# EAGLE board mrone (EAGLE 5.10)
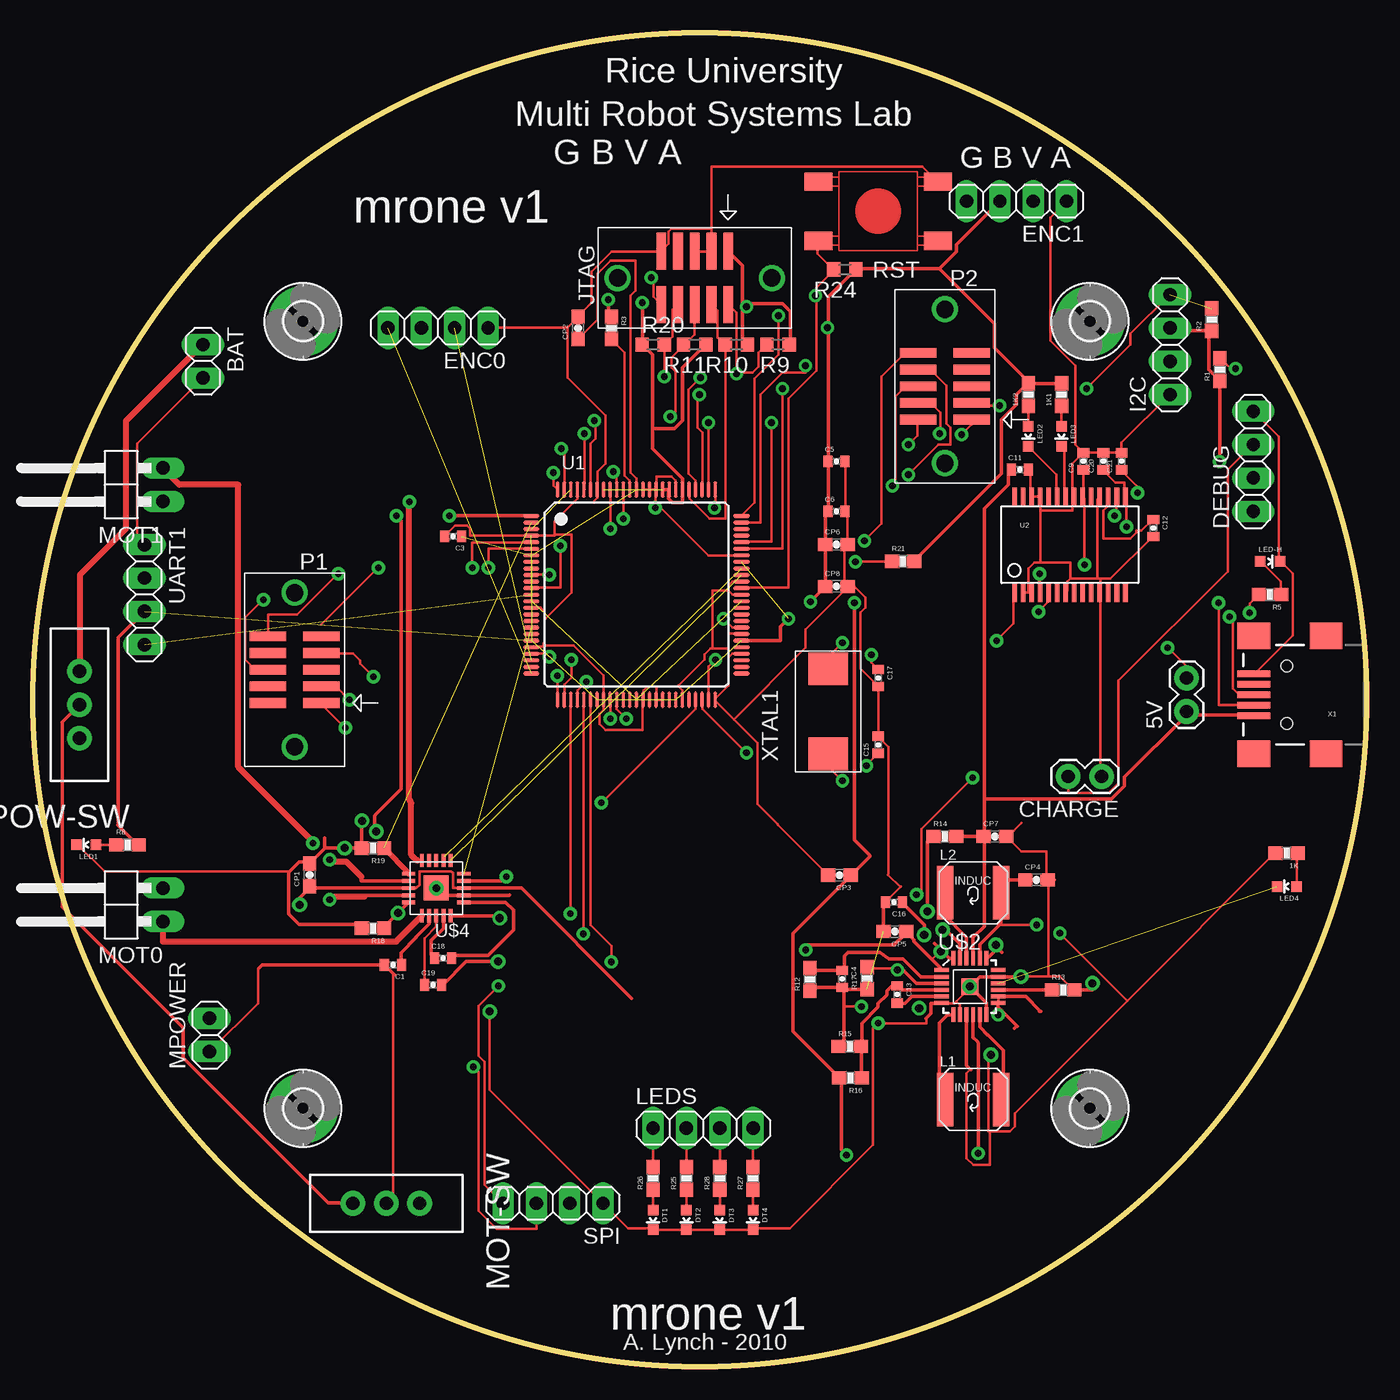
[diagram p0: board, top side]
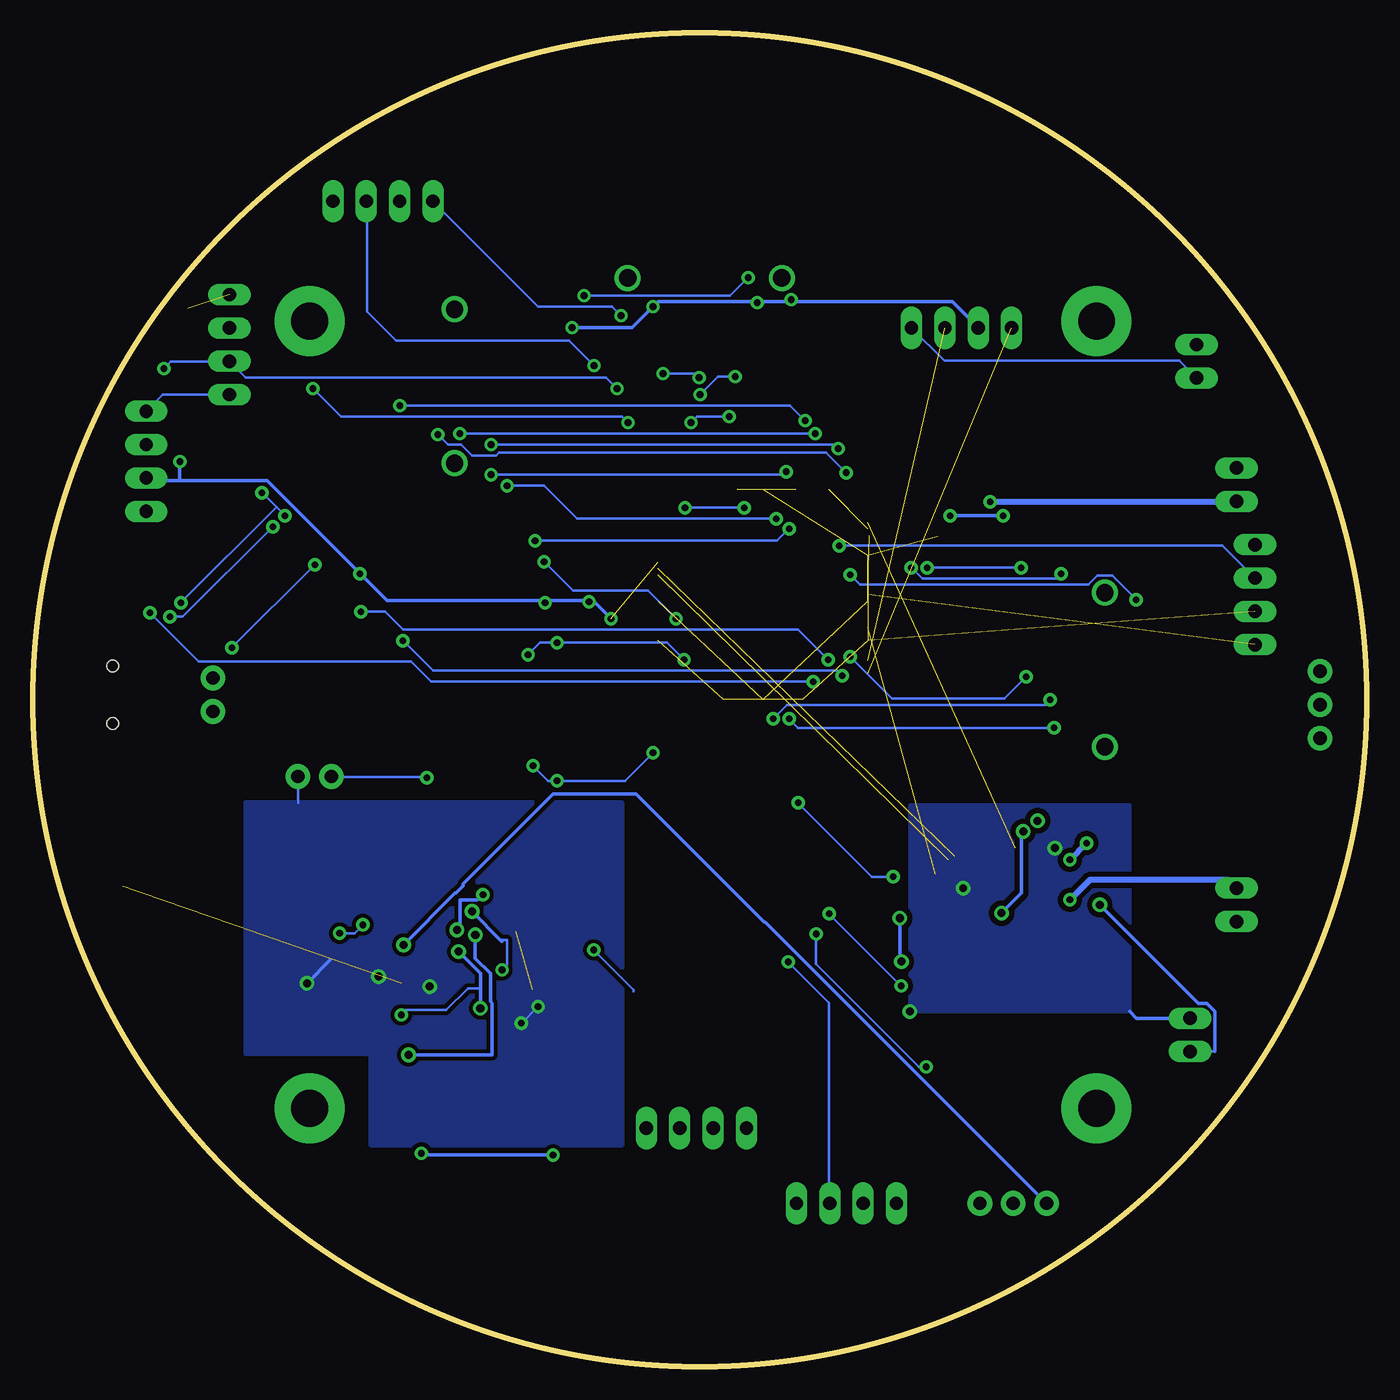
[diagram p1: board, bottom side, seen from below]

Size 101.6 x 101.6 mm. Coordinates in mm from the lower left corner, seen from the top.
Outline: circle at 50.8,50.8 radius 50.8
Copper layers (1*16): Top 0.035mm / dielectric 1.5mm / Bottom 0.035mm
Design rules "SparkFun *": minimum track width 8mil, minimum drill 20mil, track to track 7mil, track to pad 7mil, pad to pad 7mil, via to via 7mil, smd to smd 7mil, copper to edge 10mil, drill to drill 8mil, minimum pad ring 12mil, minimum via ring 10mil, stop-mask expansion 4mil, vias tented up to drill 25mil, thermal gap 10mil
Net classes: 0 default: width 0.203 mm, drill 0.203 mm, clearance 0.203 mm; 1 motors: width 0.457 mm, drill 0.203 mm, clearance 0.203 mm; 2 power: width 0.279 mm, drill 0.203 mm, clearance 0.203 mm

## Footprints (pad centres in the part's own frame; a part is rotated, then mirrored left to right if it is on the bottom)
0603-RES = smd 1.1 x 1: 1 -0.85,0; 2 0.85,0
1X02 = drill 1.016 pad 1.88 round: 1 0,0; 2 2.54,0
1X02' = drill 1.016 long: 1 -1.27,0; 2 1.27,0
0402-CAP = smd 0.7 x 0.9: 1 -0.65,0; 2 0.65,0
0603-CAP = smd 1.1 x 1: 1 -0.85,0; 2 0.85,0
1X04 = drill 1.016 long: 1 -3.81,0; 2 -1.27,0; 3 1.27,0; 4 3.81,0
LED-0603 = smd 0.8 x 0.8: A 0,-0.75; C 0,0.75
2,8-PAD = drill 2.8 pad 5.334 round: B2,8 0,0
105-01-L-D-SM-LC = smd 0.737 x 2.794: 1 -2.54,-2.032; 2 -2.54,2.032; 3 -1.27,-2.032; 4 -1.27,2.032; 5 0,-2.032; 6 0,2.032; 7 1.27,-2.032; 8 1.27,2.032; 9 2.54,-2.032; 10 2.54,2.032 | drill 1.321 round: P$11 5.867,0; P$12 -5.867,0
LPS4018-REC = smd 1.27 x 4.064: 1 -2.134,0.025; 2 2.134,0.025
1X02/90 = drill 1.016 long: 1 -1.27,-3.81; 2 1.27,-3.81
SWITCH-SPDT = drill 1.016 pad 1.88 round: 1 0,2.54; 2 0,0; 3 0,-2.54
R0603 = smd 1 x 1.1: 1 -0.85,0; 2 0.85,0
EIA-481 = smd 1.4 x 2.1: 1 -2.25,4.55; 2 -2.25,-4.55; 3 2.25,4.55; 4 2.25,-4.55
LQFP100 = smd 0.3 x 1.25: 1 -6,-8; 2 -5.5,-8; 3 -5,-8; 4 -4.5,-8; 5 -4,-8; 6 -3.5,-8; 7 -3,-8; 8 -2.5,-8; 9 -2,-8; 10 -1.5,-8; 11 -1,-8; 12 -0.5,-8; 13 0,-8; 14 0.5,-8; 15 1,-8; 16 1.5,-8; 17 2,-8; 18 2.5,-8; 19 3,-8; 20 3.5,-8; 21 4,-8; 22 4.5,-8; 23 5,-8; 24 5.5,-8; 25 6,-8; 51 6,8; 52 5.5,8; 53 5,8; 54 4.5,8; 55 4,8; 56 3.5,8; 57 3,8; 58 2.5,8; 59 2,8; 60 1.5,8; 61 1,8; 62 0.5,8; 63 0,8; 64 -0.5,8; 65 -1,8; 66 -1.5,8; 67 -2,8; 68 -2.5,8; 69 -3,8; 70 -3.5,8; 71 -4,8; 72 -4.5,8; 73 -5,8; 74 -5.5,8; 75 -6,8 | smd 1.25 x 0.3: 26 8,-6; 27 8,-5.5; 28 8,-5; 29 8,-4.5; 30 8,-4; 31 8,-3.5; 32 8,-3; 33 8,-2.5; 34 8,-2; 35 8,-1.5; 36 8,-1; 37 8,-0.5; 38 8,0; 39 8,0.5; 40 8,1; 41 8,1.5; 42 8,2; 43 8,2.5; 44 8,3; 45 8,3.5; 46 8,4; 47 8,4.5; 48 8,5; 49 8,5.5; 50 8,6; 76 -8,6; 77 -8,5.5; 78 -8,5; 79 -8,4.5; 80 -8,4; 81 -8,3.5; 82 -8,3; 83 -8,2.5; 84 -8,2; 85 -8,1.5; 86 -8,1; 87 -8,0.5; 88 -8,0; 89 -8,-0.5; 90 -8,-1; 91 -8,-1.5; 92 -8,-2; 93 -8,-2.5; 94 -8,-3; 95 -8,-3.5; 96 -8,-4; 97 -8,-4.5; 98 -8,-5; 99 -8,-5.5; 100 -8,-6
SSOP28DB = smd 0.348 x 1.397: 1 -4.225,-3.656; 2 -3.575,-3.656; 3 -2.925,-3.656; 4 -2.275,-3.656; 5 -1.625,-3.656; 6 -0.975,-3.656; 7 -0.325,-3.656; 8 0.325,-3.656; 9 0.975,-3.656; 10 1.625,-3.656; 11 2.275,-3.656; 12 2.925,-3.656; 13 3.575,-3.656; 14 4.225,-3.656; 15 4.225,3.656; 16 3.575,3.656; 17 2.925,3.656; 18 2.275,3.656; 19 1.625,3.656; 20 0.975,3.656; 21 0.325,3.656; 22 -0.325,3.656; 23 -0.975,3.656; 24 -1.625,3.656; 25 -2.275,3.656; 26 -2.925,3.656; 27 -3.575,3.656; 28 -4.225,3.656
QFN-24 = smd 1.1 x 0.3: 1 -2.15,1.25; 2 -2.15,0.75; 3 -2.15,0.25; 4 -2.15,-0.25; 5 -2.15,-0.75; 6 -2.15,-1.25; 13 2.15,-1.25; 14 2.15,-0.75; 15 2.15,-0.25; 16 2.15,0.25; 17 2.15,0.75; 18 2.15,1.25 | smd 0.3 x 1.1: 7 -1.25,-2.15; 8 -0.75,-2.15; 9 -0.25,-2.15; 10 0.25,-2.15; 11 0.75,-2.15; 12 1.25,-2.15; 19 1.25,2.15; 20 0.75,2.15; 21 0.25,2.15; 22 -0.25,2.15; 23 -0.75,2.15; 24 -1.25,2.15 | smd 1.27 x 1.27: 25 0,0
QFN-20 = smd 1 x 0.3: 1 -2.1,1.1; 2 -2.1,0.55; 3 -2.1,0; 4 -2.1,-0.55; 5 -2.1,-1.1; 11 2.1,-1.1; 12 2.1,-0.55; 13 2.1,0; 14 2.1,0.55; 15 2.1,1.1 | smd 0.3 x 1: 6 -1.1,-2.1; 7 -0.55,-2.1; 8 0,-2.1; 9 0.55,-2.1; 10 1.1,-2.1; 16 1.1,2.1; 17 0.55,2.1; 18 0,2.1; 19 -0.55,2.1; 20 -1.1,2.1 | smd 1.9 x 1.9: THERMALPAD 0,0
USB-MINIB = smd 2.5 x 0.5: D+ 2.5,0; D- 2.5,0.8; GND 2.5,-1.6; ID 2.5,-0.8; VBUS 2.5,1.6 | smd 2.5 x 2: GND@1 -3,-4.5; GND@2 -3,4.5; GND@3 2.5,4.5; GND@4 2.5,-4.5 | hole 0.9: 0,2.2; 0,-2.2
STANDARDSMDCRYSTAL8MHZ = smd 2.5 x 3: 1 -3.25,0; 2 3.25,0

## Placement (x,y rotation side)
1K  330  [0603-RES]  95.5,39.12 180 top
1K1  330  [0603-RES]  78.36,74.04 90 top
1K2  330  [0603-RES]  75.82,74.04 90 top
5V  [1X02]  87.88,49.91 90 top
BAT  [1X02']  12.95,76.58 270 top
C1  0.1uF  [0402-CAP]  27.43,30.61 180 top
C3  0.1uF  [0402-CAP]  32,63.25 180 top
C4  0.1uF  [0402-CAP]  61.65,29.54 270 top
C5  0.1uF  [0402-CAP]  61.21,68.96 0 top
C6  0.1uF  [0402-CAP]  61.21,65.15 0 top
C9  0.1uF  [0402-CAP]  80.01,68.96 90 top
C11  0.1uF  [0402-CAP]  75.18,68.33 0 top
C12  0.1uF  [0402-CAP]  85.34,63.88 270 top
C13  1.5nF  [0402-CAP]  65.84,28.35 270 top
C15  20pf  [0402-CAP]  64.39,47.37 90 top
C16  1uF  [0402-CAP]  65.58,35.38 180 top
C17  20pf  [0402-CAP]  64.39,52.45 270 top
C18  0.1uF  [0402-CAP]  31.24,31.11 0 top
C19  0.1uF  [0402-CAP]  30.48,29.08 0 top
C20  18pf  [0402-CAP]  81.53,68.96 90 top
C21  18pf  [0402-CAP]  82.93,68.96 90 top
CHARGE  [1X02]  81.41,44.96 180 top
CP1  10uF  [0603-CAP]  21.08,37.46 90 top
CP2  10uF  [0603-CAP]  41.53,79.12 90 top
CP3  10uF  [0603-CAP]  61.44,37.44 180 top
CP4  10uF  [0603-CAP]  76.45,37.08 0 top
CP5  1uF  [0603-CAP]  65.66,33.15 180 top
CP6  1uF  [0603-CAP]  61.21,62.61 0 top
CP7  4.7uF  [0603-CAP]  73.28,40.39 0 top
CP8  1uF  [0603-CAP]  61.21,59.44 0 top
DEBUG  [1X04]  92.96,68.96 90 top
DT1  Power  [LED-0603]  47.24,11.18 180 top
DT2  Power  [LED-0603]  49.78,11.18 180 top
DT3  Power  [LED-0603]  52.32,11.18 180 top
DT4  Power  [LED-0603]  54.86,11.18 180 top
ENC0  [1X04]  30.86,79.12 180 top
ENC1  [1X04]  74.93,88.77 180 top
H1  MOUNT-PAD-ROUND2.8  [2,8-PAD]  80.52,19.68 0 top
H2  MOUNT-PAD-ROUND2.8  [2,8-PAD]  20.57,19.68 0 top
H3  MOUNT-PAD-ROUND2.8  [2,8-PAD]  80.52,79.63 0 top
H4  MOUNT-PAD-ROUND2.8  [2,8-PAD]  20.57,79.63 0 top
I2C  [1X04]  86.61,77.85 90 top
JTAG  SAMTECJ-TAG  [105-01-L-D-SM-LC]  50.42,82.93 180 top
L1  2.2uH  [LPS4018-REC]  71.63,20.32 0 top
L2  3.3uH  [LPS4018-REC]  71.63,36.07 0 top
LED1  Power  [LED-0603]  4.06,39.75 90 top
LED2  TXLED  [LED-0603]  75.82,70.87 180 top
LED3  RXLED  [LED-0603]  78.36,70.87 180 top
LED4  Charge  [LED-0603]  95.5,36.58 90 top
LED-H  Blinky  [LED-0603]  94.23,61.34 270 top
LEDS  [1X04]  51.05,18.16 0 top
MOT0  [1X02/90]  6.1,35.18 90 top
MOT1  [1X02/90]  6.1,67.18 90 top
MOT-SW  [SWITCH-SPDT]  26.92,12.45 270 top
MPOWER  [1X02']  13.46,25.27 90 top
P1  50MILHEADERS  [105-01-L-D-SM-LC]  19.94,53.09 90 top
P2  50MILHEADERS  [105-01-L-D-SM-LC]  69.47,74.68 90 top
POW-SW  [SWITCH-SPDT]  3.56,50.42 180 top
R1  3K  [0603-RES]  90.42,75.95 90 top
R2  3K  [0603-RES]  89.79,79.76 90 top
R3  10K  [0603-RES]  44.07,79.12 270 top
R5  330  [0603-RES]  94.23,58.8 180 top
R8  330  [0603-RES]  7.21,39.75 0 top
R9  27  [R0603]  56.77,77.85 180 top
R10  27  [R0603]  53.59,77.85 180 top
R11  27  [R0603]  50.42,77.85 180 top
R12  3.01K  [0603-RES]  59.21,29.49 90 top
R13  2K  [0603-RES]  78.49,28.7 0 top
R14  100K  [0603-RES]  69.47,40.39 0 top
R15  105K  [0603-RES]  62.23,24.38 0 top
R16  324K  [0603-RES]  62.28,22 180 top
R17  100K  [0603-RES]  63.55,29.59 90 top
R18  0.1  [0603-RES]  25.91,33.4 180 top
R19  0.1  [0603-RES]  25.91,39.5 180 top
R20  27  [R0603]  47.24,77.85 0 top
R21  10K  [0603-RES]  66.29,61.34 0 top
R24  10K  [R0603]  61.85,83.57 180 top
R25  330  [0603-RES]  49.78,14.35 90 top
R26  330  [0603-RES]  47.24,14.35 90 top
R27  330  [0603-RES]  54.86,14.35 90 top
R28  330  [0603-RES]  52.32,14.35 90 top
RST  PUSHBUTTONSWITCH  [EIA-481]  64.39,88.01 90 top
SPI  [1X04]  39.62,12.45 180 top
U1  LM3S8962  [LQFP100]  45.97,58.8 270 top
U2  FT232RL-BASICSSOP  [SSOP28DB]  78.99,62.61 0 top
U$2  POWER-LTC3566  [QFN-24]  71.37,28.96 0 top
U$4  MOTOR-A3906  [QFN-20]  30.73,36.45 180 top
UART1  [1X04]  8.51,58.8 270 top
X1  USBSMD  [USB-MINIB]  95.5,51.18 180 top
XTAL1  8MHZ  [STANDARDSMDCRYSTAL8MHZ]  60.58,49.91 90 top

## Library data of the parts
1K 1K1 1K2 5V C1 C3-C6 C9 C11-C13 C15-C21 CHARGE DT1-DT4 LED1-LED4 LED-H MOT-SW POW-SW R1-R3 R5 R8 R12-R19 R21 R25-R28 U2 X1 = SparkFun
BAT DEBUG ENC0 ENC1 I2C LEDS MOT0 MOT1 MPOWER SPI UART1 = pinhead
CP1-CP8 JTAG L1 L2 P1 P2 RST U$2 U$4 XTAL1 = mrone
H1-H4 = holes
R9-R11 R20 R24 = resistor
U1 = luminary-arm

## Nets
+3.3V [power]: 1K1.2 1K2.2 C5.1 C6.1 CP3.1 CP6.1 CP8.1 DEBUG.2 ENC0.3 ENC1.3 I2C.3 JTAG.1 R1.1 R2.1 R3.1 R8.2 R9.1 R10.1 R11.1 R16.2 R20.1 R21.2 R24.1 U1.8 U1.20 U1.32 U1.36 U1.44 U1.56 U1.68 U1.81 U1.83 U1.84 U1.93 U2.4 U$2.10 UART1.3
+3.3VLDO: CP5.1 U$2.1 U$2.13 U$2.14 U$2.24
+5V: 5V.2 C9.1 U2.20
+5VUSB [power]: 5V.1 C11.1 CP7.1 R14.2 U$2.21 X1.VBUS
ADC2: U1.5
ADC2_NR: P1.9
ADC3: U1.6
ADC3_NR: P1.10
CHRG: LED4.C U$2.16
FTDI-RX: U1.26 U2.1
FTDI-TX: U1.27 U2.5
GND: BAT.2 C3.2 C4.2 C5.2 C6.2 C9.2 C11.2 C12.2 C15.2 C16.2 C17.2 C20.2 C21.2 CHARGE.1 CP1.2 CP2.2 CP3.2 CP4.2 CP5.2 CP6.2 CP7.2 CP8.2 DEBUG.4 DT1.C DT2.C DT3.C DT4.C ENC0.1 ENC1.1 I2C.1 JTAG.3 JTAG.5 JTAG.9 LED1.C LED-H.C MPOWER.2 R12.1 R13.2 R15.1 R17.1 R18.2 R19.2 RST.4 SPI.1 U1.4 U1.9 U1.15 U1.21 U1.33 U1.39 U1.41 U1.42 U1.45 U1.50 U1.54 U1.57 U1.63 U1.65 U1.69 U1.76 U1.82 U1.85 U1.86 U1.87 U1.94 U1.97 U2.2 U2.3 U2.7 U2.11 U2.18 U2.21 U2.25 U2.26 U$2.6 U$2.8 U$2.12 U$2.17 U$2.25 U$4.2 U$4.THERMALPAD UART1.1 X1.GND
I2C_SCL: I2C.2 R1.2 U1.70
I2C_SDA: I2C.4 R2.2 U1.71
LED_HEART: R5.2 U1.29
MOT0_CUR [power]: R18.1 U1.1 U$4.15
MOT0_PWMA: U1.47 U$4.4
MOT0_PWMB: U1.18 U$4.5
MOT1_CUR [power]: R19.1 U1.2 U$4.11
MOT1_PWMA: U1.66 U$4.6
MOT1_PWMB: U1.67 U$4.7
N$1: C3.1 CP2.1 U1.7 U1.14 U1.38 U1.62 U1.88
N$2: 1K.1 LED4.A
N$3: LED-H.A R5.1
N$4: C18.1 U$4.19
N$5: R21.1 U1.58
N$6: LED1.A R8.1
N$7: R14.1 R17.2 U$2.3
N$8: C4.1 R12.2 U$2.2
N$9: C20.1 U2.15 X1.D+
N$10: LED2.C U2.23
N$11: L2.1 U$2.22
N$12 [motors]: MOT0.1 U$4.16
N$13: L1.1 U$2.7
N$14: L1.2 U$2.11
N$15: C13.2 U$2.5
N$16: C13.1 R15.2 R16.1 U$2.4
N$17: LED3.C U2.22
N$18 [motors]: MOT0.2 U$4.14
N$19 [motors]: MOT1.2 U$4.12
N$20 [motors]: MOT1.1 U$4.10
N$21 [motors]: BAT.1 POW-SW.3
N$23: C18.2 U$4.1
N$24: R13.1 U$2.15
N$26: C19.1 U$4.18
N$27: C21.1 U2.16 X1.D-
N$28: C19.2 U$4.20
N$29: C1.1 U$4.17
N$30: 1K2.1 LED2.A
N$34: 1K1.1 LED3.A
N$36: LEDS.1 R26.2
N$37: C12.1 U2.17
N$38: U1.3 U1.98
N$39: C15.1 U1.48 XTAL1.1
N$40: C17.1 U1.49 XTAL1.2
N$41: DT2.A R25.1
N$42: DT1.A R26.1
N$43: DT4.A R27.1
N$44: DT3.A R28.1
N$45: LEDS.2 R25.2
N$46: LEDS.3 R28.2
N$47: LEDS.4 R27.2
N$56: R3.2 U1.89
PA6: U1.34
PA6_NR: P1.1
PA7: U1.35
PA7_NR: P1.3
PB4: U1.92
PB4_NR: P2.10
PB5: U1.91
PB5_NR: P2.8
PB6: U1.90
PB6_NR: P2.6
PC5: U1.24
PC5_NR: P1.5
PC7: U1.22
PC7_NR: P1.7
PD0: U1.10
PD0_NR: P1.6
PD1: U1.11
PD1_NR: P1.4
PD4: U1.95
PD4_NR: P2.3
PD5: U1.96
PD5_NR: P2.4
PD6: U1.99
PD6_NR: P2.2
PD7: U1.100
PD7_NR: P2.1
PF1: U1.61
PF1NR: P2.9
PF2: U1.60
PF2_NR: P2.7
PF3: U1.59
PF3_NR: P2.5
PG0: U1.19
PG0_NR: P1.8
POWER_CHRGEN: CHARGE.2 DEBUG.3 U$2.23
PWM4: U1.72
PWM5: U1.73
QEI0_A: ENC0.4 U1.25
QEI0_B: ENC0.2 U1.23
QEI1_A: ENC1.4 U1.75
QEI1_B: ENC1.2 U1.74
RST: JTAG.10 R24.2 RST.1 U1.64
SPI_MISO: SPI.3 U1.30
SPI_MOSI: SPI.2 U1.31
SPI_SCK: SPI.4 U1.28
TCK: JTAG.4 R10.2 U1.80
TDI: JTAG.8 R20.2 U1.78
TDO: JTAG.6 R11.2 U1.77
TMS: JTAG.2 R9.2 U1.79
U1_RX: U1.12 UART1.2
U1_TX: U1.13 UART1.4
VBAT [power]: MOT-SW.3 POW-SW.2 U$2.19
VBAT+300: 1K.2 C16.1 CP4.1 L2.2 U$2.9 U$2.20
VBAT-MOT: C1.2 CP1.1 MOT-SW.2 MPOWER.1 U$4.3 U$4.13

## Tracks (layer width: path | path; a pad name or v marks a point on that pad's centre or on a via)
+3.3V  (via drill 0.51)  (8 unrouted)
  Top 0.254: 71.62,25.1 U$2.10
  Top 0.279: R16.2 61.54,21.97 | 71.62,25.1 71.96,24.76 72.01,24.64 v72.01,16.26 | R8.2 8,39.75 6.48,41.27 6.5,41.35 6.5,55.52 UART1.3 | R16.2 61.34,22.1 57.91,25.53 57.91,33.02 62.23,37.34 CP3.1 62.36,37.46 63.75,38.86 63.73,38.99 62.59,40.13 v62.59,58.19 | v61.98,16.13 61.59,16.51 61.59,21.84 R16.2 | R21.2 67.16,61.39 73.79,68.02 73.79,72.14 74.93,73.28 74.93,74.04 75.77,74.88 1K2.2 | 1K1.2 78.36,74.88 75.92,74.88 1K2.2 | I2C.3 86.66,79.07 86.66,78.92 R2.1 89.56,78.84 89.56,75.95 90.4,75.11 R1.1 90.4,74.95 v90.4,68.94 | 60.6,79.15 60.6,69.09 C5.1 60.6,68.94 60.6,65.28 C6.1 60.53,65.13 60.38,64.97 60.38,62.61 CP6.1 60.38,62.53 60.38,59.49 CP8.1 60.3,59.33 v59.23,58.27 | 60.6,79.15 60.6,81.51 62.66,83.57 R24.1 62.81,83.64 69.06,83.64 | v57.56,56.97 56.95,56.36 56.95,55.3 U1.56 | v76.68,60.4 76.68,59.03 U2.4 | 69.06,83.64 70.36,84.94 70.36,85.47 ENC1.3 | 1K2.2 75.84,75.03 73.25,77.62 73.25,79.45 69.06,83.64 | U1.84 48.03,66.8 48.41,66.8 U1.83 48.41,66.73 48.41,66.12 48.72,65.81 49.48,65.81 49.48,66.73 U1.81 49.48,67.64 47.19,69.93 47.19,71.45 | 47.19,71.45 47.19,77.09 46.43,77.85 R20.1 46.43,77.93 v46.43,81.05 | R11.1 51.23,77.85 49.48,76.1 49.48,72.06 48.87,71.45 47.19,71.45 | 54.05,80.97 54.05,83.87 JTAG.1 | 54.05,80.97 54.05,78.23 54.43,77.85 R10.1 | 54.36,80.97 57.1,80.97 57.71,80.37 57.71,77.93 R9.1 | 54.36,80.97 54.05,80.97 | v43.84,81.28 43.84,80.21 44.07,79.98 R3.1 | v54.36,80.75 54.36,80.97 | 60.6,79.15 v60.53,79.15
  Bottom 0.279: v72.01,16.26 71.88,16.13 v61.98,16.13 | v57.56,56.97 58.85,58.27 v59.23,58.27 59.31,58.34 62.59,58.34 | 62.59,58.34 74.62,58.34 v76.68,60.4 83.77,67.49 90.4,67.49 | 90.4,67.49 92.76,67.49 DEBUG.2 | 90.4,67.49 v90.4,68.94 | v62.59,58.19 62.59,58.34 | ENC0.3 29.59,79.15 31.57,81.13 43.69,81.13 v43.84,81.28 43.84,81.13 46.43,81.13 | 46.43,81.13 53.97,81.13 v54.36,80.75 55.96,79.15 v60.53,79.15 | 46.43,81.13 v46.43,81.05
+3.3VLDO  (via drill 0.51, 0.61)
  Top 0.203: v58.88,31.75 58.88,32.13 | U$2.13 73.53,27.81 U$2.14 | v73.53,26.8 73.82,27.09 | v69.16,31.62 69.09,31.62 68.49,31.03
  Top 0.254: U$2.1 69.22,30.29 68.49,31.03 67.13,32.38 67.13,32.52 CP5.1 66.5,33.02 65.61,32.13 58.88,32.13 | U$2.24 69.81,31.11 69.23,31.69 | 69.23,31.69 68.66,32.26 | v67.51,27.3 67.26,27.05 | v69.16,31.62 69.23,31.69 | U$2.13 73.52,27.39 73.82,27.09 74.94,25.97 | 74.94,25.97 75.01,25.91 | 74.94,25.97 74.75,25.78 | U$2.14 75.63,28.21 76.72,27.11 | 76.72,27.11 76.78,27.05 | 76.72,27.11 76.66,27.05
  Bottom 0.203: v58.88,31.75 55.83,28.7 55.83,28.57 | v73.53,26.8 73.15,27.18 70.1,27.18 68.45,28.83 67.51,28.83
  Bottom 0.254: v69.16,31.62 67.51,29.97 67.51,28.83 v67.51,27.3
+5V  (via drill 0.51)
  Top 0.203: C9.1 80.03,68.25 80.03,66.27 U2.20 80.03,66.19 80.11,66.12 v80.11,61.09 | v86.44,54.76 87.88,53.31 5V.2
  Bottom 0.203: v86.44,54.76 v80.11,61.09
+5VUSB
  Top 0.254: U$2.21 71.62,32.69
  Top 0.279: CP7.1 R14.2 70.31,40.51 | CP7.1 72.47,40.26 72.47,33.53 71.62,32.69 | X1.VBUS 92.99,49.66 87.88,49.66 5V.1 87.81,49.58 83.16,44.93 83.16,44.25 82.17,43.26 72.49,43.26 | 72.49,43.26 72.49,40.51 CP7.1 | 72.49,43.26 72.49,65.35 74.32,67.18 74.32,68.17 74.47,68.33 C11.1
ADC2  (via drill 0.51)
  Top 0.203: v33.48,60.86 33.48,62.76 37.97,62.76 U1.5 | 21.97,56.51 v26.31,60.86
  Bottom 0.203: v26.31,60.86 v33.48,60.86
ADC3  (via drill 0.51)
  Top 0.203: v34.7,60.86 34.7,62.31 U1.6 | v23.27,60.4 20.14,57.28 17.93,57.28 17.93,55.68
  Bottom 0.203: v34.7,60.86 33.86,60.02 23.65,60.02 v23.27,60.4
CHRG  (1 unrouted)
FTDI-RX  (via drill 0.51)
  Top 0.203: v39.95,52.63 39.95,50.88 U1.26 | v73.41,55.3 74.7,56.59 74.7,58.95 U2.1
  Bottom 0.203: v39.95,52.63 40.34,53.01 71.12,53.01 v73.41,55.3
FTDI-TX  (via drill 0.51)
  Top 0.203: v41.02,53.85 41.02,52.48 40.49,51.94 40.49,50.88 U1.27 | v76.61,57.51 77.37,58.27 U2.5
  Bottom 0.203: v41.02,53.85 43.31,56.13 73.41,56.13 74.78,57.51 v76.61,57.51
GND  (via drill 0.51, 0.6, 0.61)  (2 unrouted)
  Top 0.203: 66.08,36.54 64.97,35.43 C16.2 | 66.08,36.54 66.12,36.58 | 70.33,27.84 70.18,27.69 69.29,27.69 U$2.6 | 70.33,27.84 71.32,28.83 U$2.25 | CP4.2 77.22,37.08 77.22,39.24 75.31,39.24 74.17,40.39 CP7.2 74.29,40.39 75.31,41.4 | 74.61,29.71 74.68,29.72 v75.26,29.72 77.34,29.72 | 70.33,27.84 70.61,27.56 70.61,26.92 U$2.8 | 77.34,29.72 78.23,29.72 79.25,28.7 R13.2 | 77.34,29.72 77.34,37.08 | v63.12,27.43 61.79,27.43 | 68.05,26.57 68.07,26.54 68.07,26.16 v64.39,26.16 64.01,25.78 64.01,16.89 57.66,10.54 54.86,10.54 DT4.C 54.86,10.41 52.32,10.41 | 49.78,10.41 47.24,10.41 DT1.C 47.24,10.54 45.34,10.54 SPI.1 34.8,21.08 v34.8,27.05 | 49.78,10.41 52.32,10.41 | 49.78,10.41 DT2.C | 52.32,10.41 DT3.C | LED1.C 3.43,39.75 5.46,37.72 19.43,37.72 19.48,37.64 | 66.08,36.54 65.15,37.46 65.18,37.54 65.18,47.22 64.41,47.98 C15.2 64.41,48.06 64.41,51.79 C17.2 64.34,51.87 63.04,53.16 63.04,57.43 63.42,57.81 63.42,58.57 62.59,59.41 62.13,59.41 CP8.2 | CP3.2 60.58,37.46 56.77,41.27 56.72,41.35 55.19,42.87 55.19,47.52 53.4,49.31 | UART1.1 8.48,62.61 7.95,63.14 7.95,70.31 BAT.2 | 40.72,79.15 41.48,79.91 CP2.2 41.55,80.06 42.54,81.05 42.54,83.41 44.07,84.94 47.8,84.94 JTAG.9 47.88,85.01 48.41,85.55 48.41,86.46 48.64,86.69 51.69,86.69 | 40.72,79.15 34.7,79.15 ENC0.1 | 51.69,86.69 51.69,91.41 67.77,91.41 68.91,90.27 RST.4 | 51.69,86.69 JTAG.3 51.61,84.94 50.47,84.94 JTAG.5 | C5.2 61.9,68.94 61.9,65.2 C6.2 61.9,65.13 62.05,64.97 62.05,62.61 CP6.2 62.05,62.53 61.82,62.31 61.82,59.71 62.05,59.49 CP8.2 | 39.73,63.37 39.73,64.36 41.21,65.85 | 39.73,63.37 39.73,63.3 38.05,63.3 U1.4 37.9,63.3 33.32,63.3 33.32,63.83 33.1,64.06 32.18,64.06 31.5,63.37 31.5,63.3 C3.2
  Top 0.203: 41.21,65.85 41.48,66.12 41.48,66.73 U1.97 | 41.21,65.85 41.25,65.81 42.62,65.81 43,66.19 43,66.73 U1.94 43,66.88 43,68.17 43.61,68.78 43.61,72.44 40.72,75.34 40.72,79.15 | 38.89,54.91 38.89,55.07 38.96,55.14 38.96,56.97 | 38.89,54.91 38.89,54.84 38.05,54.84 U1.21 | 38.96,56.97 38.96,57.51 38.66,57.81 38.05,57.81 U1.15 | 38.89,54.91 41.17,54.91 43.46,52.63 43.46,50.88 U1.33 43.46,50.72 43.46,50.04 43.16,49.73 43.16,48.97 43.61,48.51 46.43,48.51 46.43,50.72 U1.39 46.51,50.88 46.51,51.49 46.81,51.79 47.5,51.79 | U1.87 46.51,66.8 U1.86 47.04,66.8 47.42,66.8 U1.85 | U1.82 48.95,66.8 48.95,67.49 48.64,67.79 47.5,67.79 47.5,66.88 U1.85 | v51.92,65.43 51.99,65.51 51.99,66.73 U1.76 | U1.85 47.42,66.73 v47.42,65.43 47.8,65.43 51.46,61.77 52.98,61.77 | 52.98,59.11 53.29,58.8 U1.63 | 52.98,59.11 52.98,59.49 | 52.98,59.49 53.29,59.79 53.9,59.79 U1.65 | 52.98,61.77 53.9,61.77 U1.69 | 52.98,59.49 52.98,61.77 | 47.5,51.79 47.5,50.88 U1.41 47.57,50.8 47.95,50.8 U1.42 | 49.17,51.79 49.48,51.49 49.48,50.88 U1.45 | 47.5,51.79 49.17,51.79 | 52.98,54 52.98,51.87 51.99,50.88 U1.50 51.99,50.72 53.4,49.31 | 52.98,54 53.29,54.3 53.9,54.3 U1.54 | 52.98,54.69 52.98,55.83 53.9,55.83 U1.57 | 52.98,54.69 52.98,54 | 51.77,54.69 51.61,54.69 51.16,54.23 51.16,53.85 49.17,51.87 49.17,51.79 | 51.77,54.69 52.98,54.69 | 52.98,59.11 51.77,59.11 51.77,54.69 | 39.73,63.37 41.02,63.37 41.02,58.95 39.04,56.97 38.96,56.97 | CP8.2 62.05,59.33 58.85,56.13 58.85,54.76 53.4,49.31 | C11.2 76,68.17 76,66.27 U2.26 76.15,66.27 76.68,66.27 U2.25 76.76,66.19 76.76,65.2 | 75.84,58.95 76,58.95 U2.3 | 75.84,58.95 75.46,58.95 U2.2
  Top 0.203: 81.33,60.02 82.09,60.02 85.29,63.22 C12.2 | 81.33,60.02 81.33,59.03 U2.11 81.33,58.88 81.33,45.08 81.41,45.01 CHARGE.1 | 79.04,60.02 78.82,59.79 78.82,59.11 78.74,59.03 U2.7 | 81.1,60.02 79.04,60.02 | 81.33,60.02 81.1,60.02 | U2.18 81.25,66.19 81.1,66.04 81.1,60.02 | 76.76,61.24 79.04,61.24 79.04,60.02 | 76.76,61.24 76.3,61.24 75.84,60.78 75.84,58.95 | 76.76,61.24 76.76,65.2 | X1.GND 93.07,52.78 95.96,55.68 95.96,60.4 95.05,61.32 LED-H.C 94.97,61.39 94.89,61.47 94.89,70.84 DEBUG.4 | C9.2 80.03,69.62 81.48,69.62 C20.2 81.64,69.62 C21.2 82.93,70.38 86.59,74.04 I2C.1 | C9.2 79.96,69.54 79.2,68.78 79.2,66.34 79.27,66.27 U2.21 79.2,66.27 79.2,65.2 76.76,65.2 | ENC1.1 78.74,88.75 77.52,87.53 77.52,78.16 79.43,76.25 79.43,70.23 79.96,69.7 C9.2
  Top 0.254: U$4.THERMALPAD 31.28,35.9 U$4.2 36.28,35.9 36.3,35.92 | v23.75,39.5 22.26,39.5 CP1.2 | v23.75,39.5 22.25,39.5 22.24,39.48 | v23.75,39.5 R19.2 25.06,41.52 25.07,41.53 | 22.24,39.48 21.18,38.43 20.27,38.43 19.48,37.64 19.48,34.49 20.27,33.71 24.75,33.71 R18.2 | 61.79,28.74 R17.1 | 61.79,28.74 C4.2 59.46,28.89 R12.1 | 61.79,28.74 61.79,27.43 61.79,24.8 R15.1 | U$2.12 72.62,27.71 U$2.25 72.12,29.71 U$2.17 74.61,29.71 | CP5.2 64.81,35.26 C16.2 | v80.72,29.21 80.72,28.7 R13.2 | CP4.2 77.34,37.08 77.8,37.08 | 68.02,26.54 68.05,26.57 68.4,26.92 68.4,27.69 69.16,27.69 U$2.6 | 22.22,40.26 22.22,39.5 22.24,39.48
  Bottom 0.203: v64.39,26.16 v63.12,27.43 | BAT.2 14.27,76.63 32.18,76.63 ENC0.1 | v47.42,65.43 v51.92,65.43 | 81.41,42.93 CHARGE.1 | DEBUG.4 91.69,74.04 I2C.1
  Bottom 0.254: v80.72,29.21 78.94,30.99 | MPOWER.2 17.53,26.54 18.03,27.05
  other vias: 30.73,36.45 71.37,28.96
  pour Bottom (isolate 0.406): 18.03,42.8 34.8,42.8 34.8,27.05 18.03,27.05
  pour Bottom (isolate 0.305): 56.77,16.89 75.82,16.89 75.82,23.88 85.34,23.88 85.34,42.93 56.77,42.93
I2C_SCL  (via drill 0.51)
  Top 0.203: v91.62,76.02 91.24,76.02 90.47,76.78 R1.2 | v57.1,74.5 57.1,62.31 U1.70
  Bottom 0.203: v91.62,76.02 91.08,76.56 86.66,76.56 I2C.2 85.37,75.34 57.94,75.34 v57.1,74.5
I2C_SDA  (via drill 0.51)  (1 unrouted)
  Top 0.203: v56.26,71.91 56.26,62.84 53.97,62.84 U1.71 | v80.26,74.5 83.62,77.85 83.62,78.69 86.59,81.66 I2C.4
  Bottom 0.203: v56.26,71.91 56.72,72.36 78.13,72.36 v80.26,74.5
LED_HEART  (via drill 0.51)
  Top 0.203: v92.69,57.43 92.69,58.11 93.37,58.8 R5.2 | v42.16,52.17 41.48,51.49 41.48,50.88 U1.29
  Bottom 0.203: v92.69,57.43 88.95,53.7 72.8,53.7 71.27,52.17 v42.16,52.17
MOT0_CUR  (via drill 0.51, 0.61)
  Top 0.279: U$4.15 28.57,35.31 v27.81,34.54 26.8,33.53 26.8,33.4 R18.1 | 26.03,40.89 v26.16,40.77 26.03,41.02 26.03,41.91 26.09,42.04 28.07,44.02 28.07,64.44 v27.69,64.82 | v31.72,64.82 37.97,64.82 U1.1
  Bottom 0.279: v27.81,34.54 26.29,36.07 26.29,40.64 v26.16,40.77 | v27.69,64.82 v31.72,64.82
MOT0_PWMA  (via drill 0.51)
  Top 0.203: v43.31,42.95 50.47,50.11 U1.47 | v36.07,37.31 35.92,37.16 35.81,37.08
  Top 0.254: U$4.4 35.68,37 35.71,37.03 35.81,37.08
  Bottom 0.203: v43.31,42.95 37.67,37.31 v36.07,37.31
MOT0_PWMB  (1 unrouted)
MOT1_CUR  (1 unrouted)
  Top 0.406: U$4.11 28.63,37.62 R19.1
MOT1_PWMA  (1 unrouted)
  Top 0.254: U$4.6 31.88,38.61
MOT1_PWMB  (1 unrouted)
  Top 0.203: 31.37,38.86 31.24,38.73 U$4.7
  Top 0.254: U$4.7 31.24,38.61
N$1  (5 unrouted)
  Top 0.203: CP2.1 41.55,78.31 43,79.76 43,83.26 43.99,84.25 45.9,84.25 45.9,81.97 45.52,81.58 45.52,68.1 45.97,67.64 U1.88
N$2
  Top 0.203: LED4.A 96.27,36.58 96.27,39.12 1K.1
N$3
  Top 0.203: LED-H.A 93.52,61.32 95.05,59.79 95.05,58.8 R5.1
N$4
  Top 0.254: U$4.19 31.28,33.39 30.35,32.46 30.35,31.35 C18.1
N$5  (via drill 0.51)
  Top 0.203: v62.66,61.32 65.41,61.32 R21.1 | v52.6,56.97 53.29,56.29 53.9,56.29 U1.58
  Bottom 0.203: v62.66,61.32 60.45,59.11 54.74,59.11 v52.6,56.97
N$6
  Top 0.203: LED1.A R8.1
N$7  (via drill 0.51, 0.61)
  Top 0.203: 65.86,30.35 63.7,30.35 R17.2
  Top 0.254: U$2.3 67.31,29.21 66.14,30.38 65.86,30.38 65.86,30.35 v65.86,30.23 | R17.2 63.61,30.38 | v68.15,34.67 68.15,40 68.53,40.39 R14.1
  Bottom 0.203: v65.86,30.23 65.48,30.61 65.48,32.51 65.86,32.51 65.93,32.45
  Bottom 0.254: 65.86,32.38 65.93,32.45 v68.15,34.67
N$8
  Top 0.254: U$2.2 67.65,29.71 66.29,31.06 65.23,31.06 64.52,31.57 62.1,31.57 61.82,31.29 61.82,30.37 C4.1 59.36,30.19 R12.2
N$9  (via drill 0.51)
  Top 0.203: C20.1 81.56,68.25 82.47,67.33 83.16,67.33 83.16,66.27 U2.15 83.24,66.19 83.31,66.12 v83.31,63.98 | v91.16,57.12 91.39,56.9 91.39,51.64 91.85,51.18 X1.D+
  Bottom 0.203: v83.31,63.98 90.17,57.12 v91.16,57.12
N$10
  Top 0.203: LED2.C 75.84,70.08 77.98,67.94 77.98,66.27 U2.23
N$11
  Top 0.254: U$2.22 71.12,32.71 69.42,34.42 69.42,36.02 L2.1
N$12
  Top 0.457: MOT0.1 9.91,32.38 27.69,32.38 29.59,34.29 U$4.16
N$13
  Top 0.254: U$2.7 69.68,26.81 69.06,26.19 69.06,20.78 L1.1
N$14
  Top 0.254: U$2.11 72.12,25.87 72.72,25.27 72.75,25.27 73.94,24.08 73.94,20.52 L1.2
N$15
  Top 0.254: U$2.5 66.97,28.21 66.45,27.69 65.85,27.69 C13.2
N$16
  Top 0.254: U$2.4 66.13,28.71 C13.1 65.42,29 65.05,28.63 65.05,28.32 64.39,27.66 64.39,27.41 63.14,26.16 63.14,24.45 R15.2 63.13,24.33 R16.1
N$17
  Top 0.203: LED3.C 78.36,70.08 78.59,69.85 78.59,66.34 U2.22
N$18  (via drill 0.51)
  Top 0.254: U$4.14 25.27,35.9 25.27,35.81
  Top 0.457: 25.27,35.81 22.61,35.81 v22.61,35.56
  Bottom 0.457: v22.61,35.56 21.08,37.08 10.54,37.08 MOT0.2
N$19  (via drill 0.51)
  Top 0.254: U$4.12 25.02,37 25.02,37.34
  Top 0.457: 25.02,37.34 23.88,38.48 22.61,38.48 v22.61,38.61 | 21.21,40 v21.34,39.88 21.13,40.21 15.65,45.69 15.65,67.18 11.15,67.18 9.93,68.4 MOT1.2
  Bottom 0.457: v22.61,38.61 v21.34,39.88
N$20  (via drill 0.51)
  Top 0.254: U$4.10 29.29,38.55
  Top 0.457: 29.29,38.55 29.21,38.61 28.83,38.99 28.83,42.93 28.75,43.1 28.68,43.18 v28.68,65.89
  Bottom 0.457: v28.68,65.89 9.93,65.89 MOT1.1
N$21
  Top 0.457: BAT.1 12.9,77.85 7.11,72.06 7.11,63.83 3.61,60.32 3.61,53.01 POW-SW.3
N$22  (via drill 0.6)
  other vias: 25.07,41.58
N$23
  Top 0.254: U$4.1 36.02,35.35 36.6,34.77 36.6,33.27 34.67,31.34 32.12,31.34 C18.2
N$24
  Top 0.254: U$2.15 R13.1
N$26
  Top 0.203: C19.1 29.84,29.08 29.84,32.64 30.73,33.53 U$4.18
N$27  (via drill 0.51)
  Top 0.203: v84.15,66.57 84.15,67.03 82.93,68.25 C21.1 | v82.4,64.82 82.55,64.97 82.55,66.19 U2.16 | v90.32,58.19 90.32,50.42 92.99,50.42 X1.D-
  Bottom 0.203: 83.04,65.47 v82.4,64.82 | 83.04,65.47 v84.15,66.57 | v90.32,58.19 83.04,65.47
N$28  (via drill 0.61)
  Top 0.254: U$4.20 35.3,34.35 35.36,34.29 35.43,34.29 v35.56,34.16 | v35.43,30.86 33.02,30.86 31.24,29.08 C19.2
  Bottom 0.254: v35.43,30.86 35.56,30.99 v35.56,34.16
N$29
  Top 0.254: U$4.17 30.18,33.71 29.21,32.74 29.21,32.69 28.04,31.52 28.04,30.65 C1.1
N$30
  Top 0.203: LED2.A 75.84,71.68 75.84,73.13 1K2.1
N$34
  Top 0.203: LED3.A 1K1.1
N$36
  Top 0.203: R26.2 LEDS.1
N$37
  Top 0.203: C12.1 85.29,64.52 84.45,63.68 84.07,63.68 84.07,63.52 83.62,63.07 81.56,63.07 81.56,65.2 81.86,65.51 81.86,66.19 U2.17
N$38  (1 unrouted)
N$39  (via drill 0.51)
  Top 0.203: v63.5,45.77 63.5,45.85 64.34,46.68 C15.1 | v61.67,44.63 60.6,45.69 60.6,46.61 XTAL1.1 | v54.36,46.76 51,50.11 51,50.8 U1.48
  Bottom 0.203: v63.5,45.77 62.36,44.63 v61.67,44.63 56.49,44.63 v54.36,46.76
N$40  (via drill 0.51)
  Top 0.203: v63.88,54.23 63.88,53.62 64.34,53.16 C17.1 | v61.67,55.14 60.6,54.08 60.6,53.16 XTAL1.2 | v51.99,53.85 51.46,53.31 51.46,50.88 U1.49
  Bottom 0.203: v63.88,54.23 62.97,55.14 v61.67,55.14 53.29,55.14 v51.99,53.85
N$41
  Top 0.203: R25.1 DT2.A
N$42
  Top 0.203: R26.1 DT1.A
N$43
  Top 0.203: R27.1 DT4.A
N$44
  Top 0.203: R28.1 DT3.A
N$45
  Top 0.203: R25.2 LEDS.2
N$46
  Top 0.203: R28.2 LEDS.3
N$47
  Top 0.203: R27.2 LEDS.4
N$56
  Top 0.203: R3.2 44.07,78.23 45.06,77.24 45.06,67.87 45.44,67.49 45.44,66.8 U1.89
PA6  (via drill 0.51)
  Top 0.203: v43.99,49.35 43.99,50.8 U1.34 | v23.8,48.67 21.97,50.49
  Bottom 0.203: v43.99,49.35 43.31,48.67 v23.8,48.67
PA7  (via drill 0.51)
  Top 0.203: v45.21,49.35 44.45,50.11 44.45,50.8 U1.35 | v24.1,50.8 23.11,51.79 21.97,51.79
  Bottom 0.203: v45.21,49.35 44.14,50.42 24.49,50.42 v24.1,50.8
PB4  (via drill 0.51)
  Top 0.203: v43.99,63.83 43.99,66.73 U1.92 | v63.35,62.92 64.64,64.21 64.64,75.41 66.4,77.16 67.39,77.16
  Bottom 0.203: v43.99,63.83 44.91,62.92 v63.35,62.92
PB5  (via drill 0.51)
  Top 0.203: v44.22,68.17 44.45,67.94 44.45,66.8 U1.91 | v66.7,67.94 68.99,70.23 69.9,70.23 69.9,71.53 69.6,71.83 69.6,74.73 68.38,75.95
  Bottom 0.203: v44.22,68.17 44.45,67.94 v66.7,67.94
PB6  (via drill 0.51)
  Top 0.203: v44.98,64.59 44.98,66.73 U1.90 | v65.48,67.11 65.71,67.33 65.71,73.89 66.47,74.65 67.39,74.65
  Bottom 0.203: v44.98,64.59 60.15,64.59 62.66,67.11 v65.48,67.11
PC7  (via drill 0.51)
  Top 0.203: v39.34,54.08 39.34,54.3 38.05,54.3 U1.22 | v25.93,52.55 24.94,53.54 24.94,53.77 24.41,54.3 21.97,54.3
  Bottom 0.203: v39.34,54.08 36.14,50.88 27.61,50.88 v25.93,52.55
PD0  (via drill 0.51)
  Top 0.203: v39.34,60.32 38.05,60.32 U1.10 | v17.55,58.42 16.18,57.05 16.18,53.85 16.94,53.09
  Bottom 0.203: v39.34,60.32 38.58,59.56 21.21,59.56 20.52,60.25 19.38,60.25 v17.55,58.42
PD4  (via drill 0.51)
  Top 0.203: v42.77,72.06 42.85,71.98 42.85,70.69 42.47,70.31 U1.95 | v73.63,73.2 71.5,73.2
  Bottom 0.203: v42.77,72.06 43.92,73.2 v73.63,73.2
PD5  (via drill 0.51)
  Top 0.203: v42.01,71.07 42.01,66.8 U1.96 | v69.06,71.07 69.14,71.14 69.14,72.67 68.45,73.35 67.46,73.35
  Bottom 0.203: v42.01,71.07 v69.06,71.07
PD6  (via drill 0.51)
  Top 0.203: v40.26,69.93 40.49,69.7 40.49,66.8 U1.99 | v66.7,70.23 67.39,70.92 67.39,72.14
  Bottom 0.203: v40.26,69.93 40.56,70.23 v66.7,70.23
PD7  (via drill 0.51)
  Top 0.203: v39.65,68.1 39.65,67.11 39.95,66.8 U1.100 | v70.74,70.99 71.5,71.75
  Bottom 0.203: v39.65,68.1 41.17,69.62 66.09,69.62 66.32,69.39 68.15,69.39 68.99,70.23 69.98,70.23 v70.74,70.99
POWER_CHRGEN  (via drill 0.51, 0.61)
  Top 0.203: v67.31,35.94 67.69,36.32 67.69,40.97 v71.58,44.86 | DEBUG.3 92.91,70.23 91.01,68.33 91.01,60.55 82.7,52.25 82.7,44.47 81.94,43.71 78.89,43.71 78.89,44.93 CHARGE.2
  Top 0.254: U$2.23 70.62,32.19 69.67,33.15 69.29,33.15 v69.29,33.27
  Bottom 0.203: v67.31,35.94 67.69,35.56 67.77,35.56 | v71.58,44.86 71.65,44.93 78.82,44.93 CHARGE.2
  Bottom 0.254: v69.29,33.27 69.04,33.53 69.04,35.56 67.77,35.56
QEI0_A  (1 unrouted)
QEI0_B  (1 unrouted)
QEI1_A  (via drill 0.51)
  Top 0.203: v56.79,80.06 56.79,77.09 54.97,75.26 54.97,65.81 53.97,64.82 U1.75
  Bottom 0.203: v56.79,80.06 57.48,80.75 63.12,80.75 71.12,88.75 ENC1.4
QEI1_B  (via drill 0.51)
  Top 0.203: v58.85,76.25 58.85,75.72 57.1,75.72 55.42,74.04 55.42,64.29 53.97,64.29 U1.74
  Bottom 0.203: v58.85,76.25 60.76,78.16 73.94,78.16 76.15,80.37 76.15,88.75 ENC1.2
RST  (via drill 0.51)
  Top 0.203: RST.1 59.77,85.7 59.77,84.78 R24.2 60.98,83.49 59.69,82.19 59.69,81.58 | 59.69,81.58 59.69,75.87 57.56,73.74 57.56,59.33 53.97,59.33 U1.64 | JTAG.10 47.27,81.51 47.27,82.8 v47.12,82.96 | 59.69,81.58 v59.61,81.58
  Bottom 0.203: v47.12,82.96 48.49,81.58 v59.61,81.58
SPI_MISO  (via drill 0.51)
  Top 0.203: v41.93,32.97 41.93,50.8 U1.30 | v33.55,22.83 33.93,22.45 33.93,11.86 35.31,10.49 38.35,10.49 SPI.3
  Bottom 0.203: v41.93,32.97 41.93,30.68 34.09,22.83 v33.55,22.83
SPI_MOSI  (via drill 0.51)
  Top 0.203: v44.07,30.84 44.07,32.05 42.47,33.65 U1.31
  Bottom 0.203: v44.07,30.84 40.95,27.71 40.95,12.47 SPI.2
SPI_SCK  (via drill 0.51)
  Top 0.203: v40.95,34.49 40.95,50.8 U1.28 | v35.46,29.01 33.93,27.48 33.93,23.67 34.39,23.22 34.39,13.84 35.76,12.47 SPI.4
  Bottom 0.203: v35.46,29.01 v40.95,34.49
TCK
  Top 0.203: JTAG.4 52.15,80.44 52.15,78.38 52.68,77.85 R10.2 52.76,77.78 52.76,64.59 51.54,64.59 50.01,66.12 50.01,66.73 U1.80
TDI  (via drill 0.51)
  Top 0.203: JTAG.8 49.1,80.9 48.72,80.52 48.72,78.46 48.11,77.85 R20.2 48.11,77.78 v48.11,75.41 | v50.77,74.04 50.62,73.89 50.62,71.53 51,71.14 51,66.8 U1.78
  Bottom 0.203: v50.77,74.04 49.4,75.41 v48.11,75.41
TDO  (via drill 0.51)
  Top 0.203: JTAG.6 50.39,80.9 50.39,78.61 49.63,77.85 R11.2 49.55,77.78 48.64,76.86 48.64,76.1 48.95,75.79 48.95,72.75 v48.56,72.36 | v51.46,71.91 51.46,66.8 U1.77
  Bottom 0.203: v51.46,71.91 51,72.36 v48.56,72.36
TMS  (via drill 0.51)
  Top 0.203: 53.59,75.72 54.81,75.72 55.27,76.17 55.27,77.24 55.88,77.85 R9.2 | 53.59,75.72 53.59,80.29 52.98,80.9 JTAG.2 | v50.85,75.34 49.94,74.42 49.94,68.02 50.47,67.49 U1.79 | v53.59,75.64 53.59,75.72
  Bottom 0.203: v50.85,75.34 51.16,75.64 v53.59,75.64
U1_RX  (via drill 0.51)
  Top 0.203: v40.18,62.53 40.18,59.33 38.05,59.33 U1.12
  Bottom 0.203: v40.18,62.53 11,62.53 8.56,60.1 UART1.2
U1_TX  (1 unrouted)
VBAT  (via drill 0.61)
  Top 0.279: 73.8,31.56 73.35,32 v73.35,32.13 73.35,31.75 72.72,31.11 U$2.19 | POW-SW.2 3.53,50.42 2.23,49.12 2.23,35.03 11.45,25.81 11.45,23.52 22.5,12.47 24.33,12.47 MOT-SW.3
  Bottom 0.279: v73.35,32.13 69.42,36.07 69.34,36.07 69.29,36.17 68.83,36.63 68.83,36.78 61.98,43.64 55.65,43.64 45.9,33.88 45.78,33.85 MOT-SW.3
VBAT+300  (via drill 0.51, 0.61)
  Top 0.203: 83.38,27.88 74.8,19.3 74.8,18.29 74.42,17.91 72.9,17.91 | 83.38,27.88 94.62,39.12 1K.2 | 72.9,17.91 72.77,17.91 72.77,23.49 v72.97,23.75 | 72.9,17.91 72.9,15.37 71.63,15.37 71.12,15.87 71.12,22.35 71.41,22.64 | v76.45,33.65 73.79,33.65 73.7,33.74 | 83.38,27.88 v78.23,33.02
  Top 0.254: U$2.20 72.12,32.17 73.7,33.74 73.74,33.78 73.74,36.07 L2.2 73.86,36.19 73.86,37.08 CP4.1 | U$2.9 71.12,22.93 71.41,22.64 71.45,22.61 | v67.89,32.89 67.89,33.65 66.24,35.31 C16.1 | v72.97,23.75 72.72,23.49
  Bottom 0.203: v76.45,33.65 77.09,33.02 v78.23,33.02
  Bottom 0.254: v67.89,32.89 67.89,31.11 66.75,29.97 66.75,27.81 66.62,27.69 66.62,23.75 v72.97,23.75
VBAT-MOT  (via drill 0.61)
  Top 0.203: MPOWER.1 17.14,27.69 17.14,30.23 17.2,30.33 | MOT-SW.2 27.43,12.95 27.43,29.84 27.49,29.91 | U$4.3 32,36.45 32,37.59 31.88,37.72 29.46,37.72 29.46,36.7 29.21,36.45 U$4.13
  Top 0.254: 21.08,36.45 U$4.13 | 17.2,30.33 17.47,30.61 C1.2 26.8,30.61 27.49,29.91 27.56,29.84 | 21.08,36.45 20.32,35.69 v20.32,35.18 | 21.08,36.45 CP1.1 | U$4.3 37.21,36.45 45.59,28.07
  Bottom 0.203: 11.56,24 MPOWER.1
  Bottom 0.254: v20.32,35.18 12.83,27.69 12.19,27.69 11.56,27.05 11.56,24

## Text on the board
tNames: Rice University | Multi Robot Systems Lab | G B V A | G B V A | mrone v1 | mrone v1 | A. Lynch - 2010